# EAGLE board board (EAGLE 9.1.3)
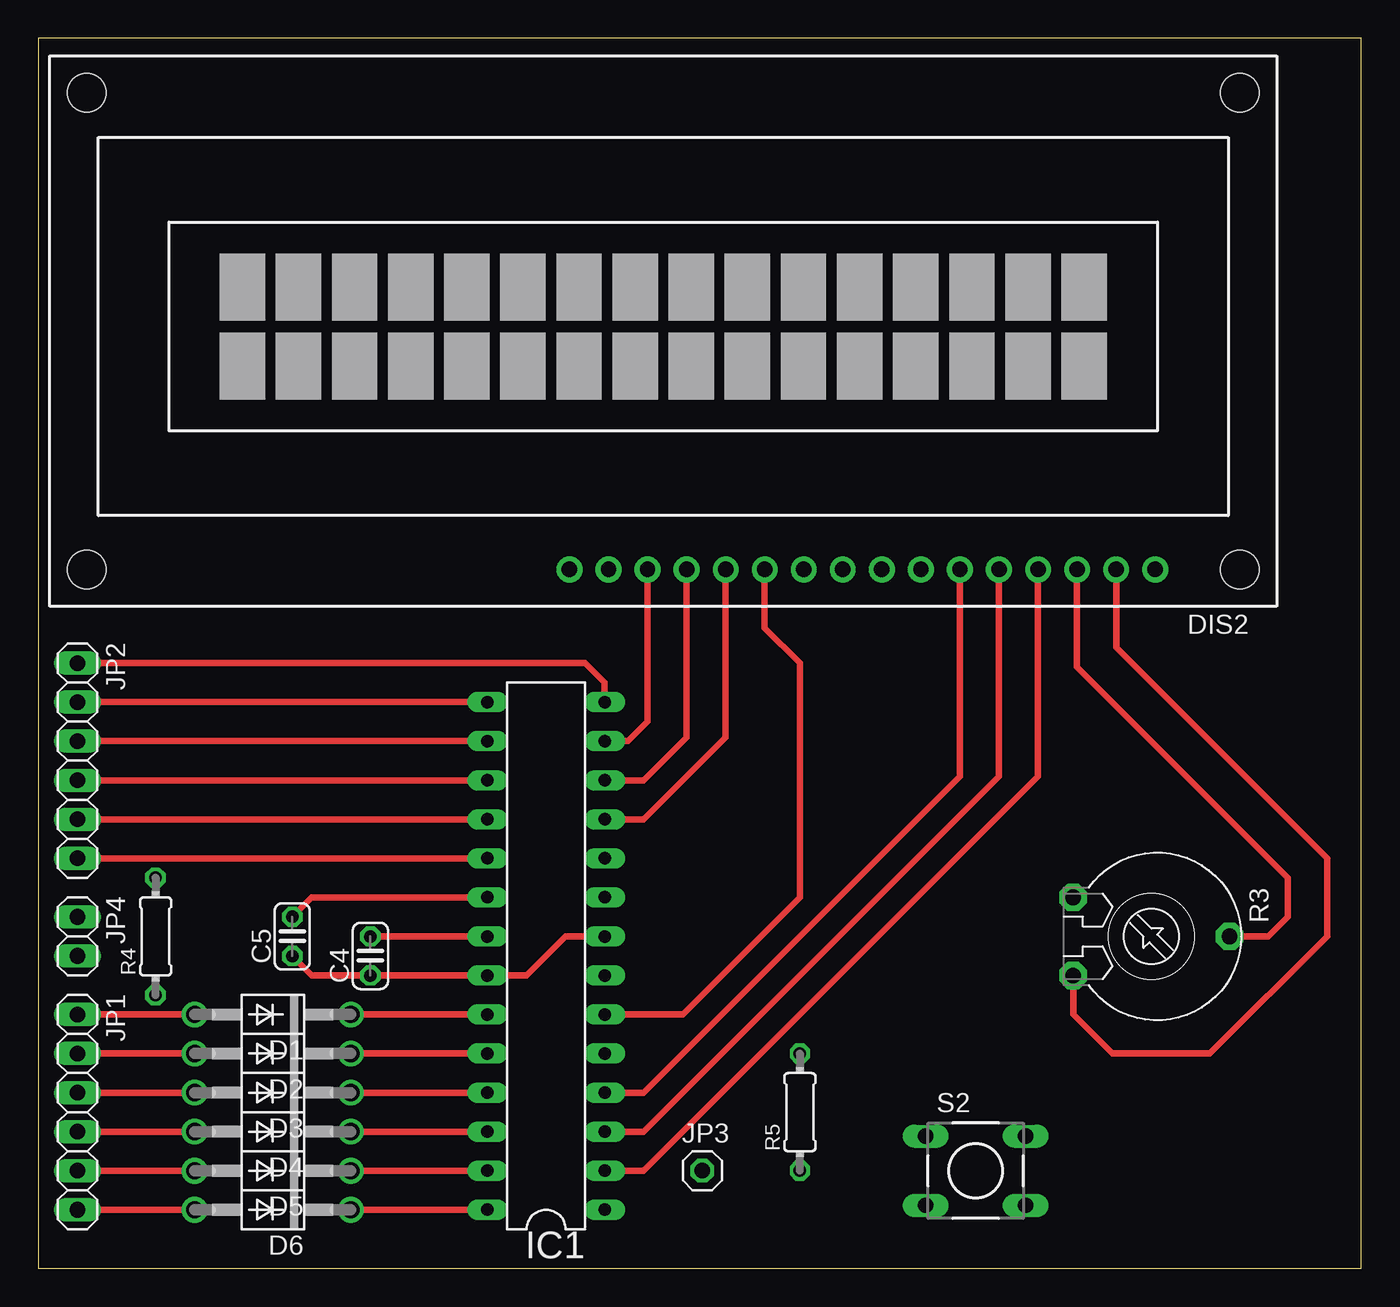
[diagram p0: board, top side]
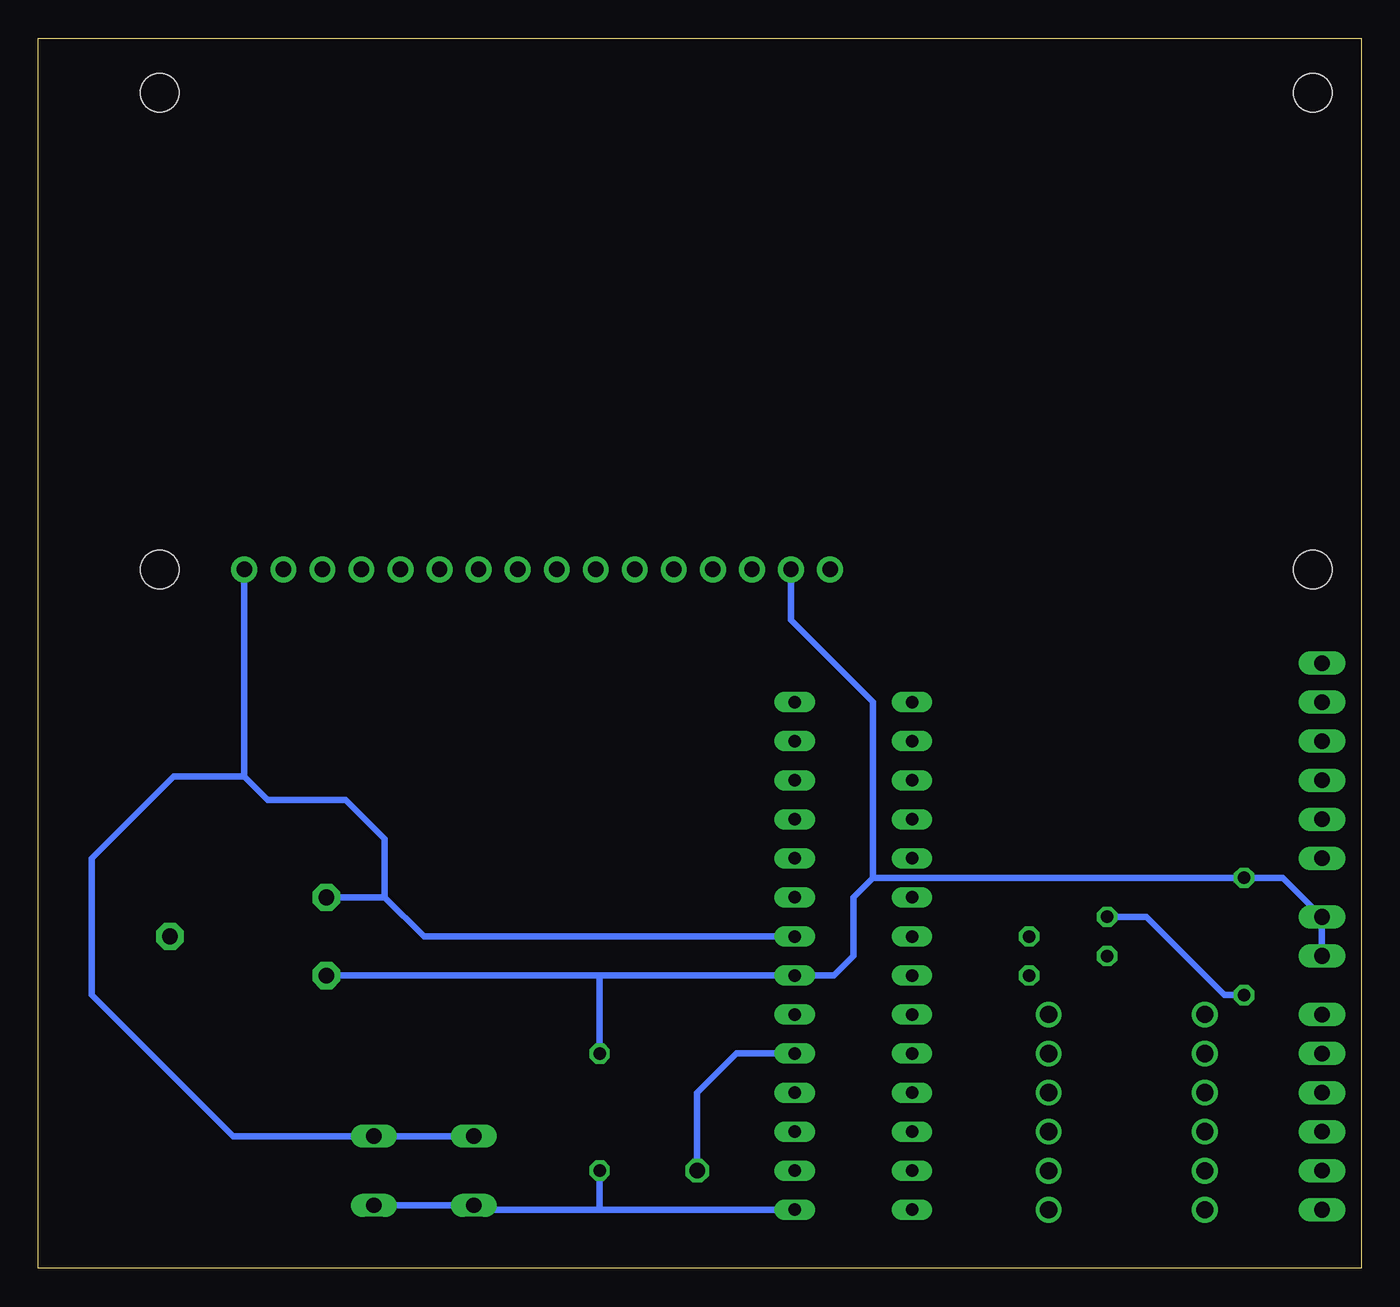
[diagram p1: board, bottom side, seen from below]

Size 86.03 x 80 mm. Coordinates in mm from the lower left corner, seen from the top.
Outline: 0,0 86.03,0 86.03,80 0,80 0,0
Copper layers (1*16): Top 0.035mm / dielectric 1.5mm / Bottom 0.035mm
Design rules "default": minimum track width 6mil, minimum drill 0.35mm, track to track 6mil, track to pad 6mil, pad to pad 6mil, via to via 6mil, smd to smd 6mil, copper to edge 40mil, drill to drill 6mil, minimum pad ring 10mil, minimum via ring 8mil, stop-mask expansion 4mil, vias tented up to drill 0mil, thermal gap 10mil
Net classes: 0 default: clearance 0.205 mm

## Footprints (pad centres in the part's own frame; a part is rotated, then mirrored left to right if it is on the bottom)
C025-024X044 = drill 0.813 octagon: 1 -1.27,0; 2 1.27,0
DO41-10 = drill 1.118: A 5.08,0; C -5.08,0
TUXGR_16X2_R2 = drill 1 pad 1.676: 1 -32,15.5; 2 -29.46,15.5; 3 -26.92,15.5; 4 -24.38,15.5; 5 -21.84,15.5; 6 -19.3,15.5; 7 -16.76,15.5; 8 -14.22,15.5; 9 -11.68,15.5; 10 -9.14,15.5; 11 -6.6,15.5; 12 -4.06,15.5; 13 -1.52,15.5; 14 1.02,15.5; 15 3.56,15.5; 16 6.1,15.5 | hole 2.5: -37.5,-15.5; 37.5,-15.5; -37.5,15.5; 37.5,15.5
DIL28-3 = drill 0.813 long: 1 -16.51,-3.81; 2 -13.97,-3.81; 3 -11.43,-3.81; 4 -8.89,-3.81; 5 -6.35,-3.81; 6 -3.81,-3.81; 7 -1.27,-3.81; 8 1.27,-3.81; 9 3.81,-3.81; 10 6.35,-3.81; 11 8.89,-3.81; 12 11.43,-3.81; 13 13.97,-3.81; 14 16.51,-3.81; 15 16.51,3.81; 16 13.97,3.81; 17 11.43,3.81; 18 8.89,3.81; 19 6.35,3.81; 20 3.81,3.81; 21 1.27,3.81; 22 -1.27,3.81; 23 -3.81,3.81; 24 -6.35,3.81; 25 -8.89,3.81; 26 -11.43,3.81; 27 -13.97,3.81; 28 -16.51,3.81
1X06 = drill 1.016 long: 1 -6.35,0; 2 -3.81,0; 3 -1.27,0; 4 1.27,0; 5 3.81,0; 6 6.35,0
1X01 = drill 1.016 octagon: 1 0,0
1X02 = drill 1.016 long: 1 -1.27,0; 2 1.27,0
PT-10 = drill 1.016 pad 1.778 octagon: 1 -2.54,-5.08; 2 2.54,-5.08; 3 0,5.08
0204/7 = drill 0.813 octagon: 1 -3.81,0; 2 3.81,0
DTS-6 = drill 1 long: 1 -3.25,2.25; 2 3.25,2.25; 3 -3.25,-2.25; 4 3.25,-2.25

## Placement (x,y rotation side)
C4  100nF  [C025-024X044]  21.59,20.32 90 top
C5  100nF  [C025-024X044]  16.51,21.59 90 top
D1  1N4004  [DO41-10]  15.24,16.51 180 top
D2  1N4004  [DO41-10]  15.24,13.97 180 top
D3  1N4004  [DO41-10]  15.24,11.43 180 top
D4  1N4004  [DO41-10]  15.24,8.89 180 top
D5  1N4004  [DO41-10]  15.24,6.35 180 top
D6  1N4004  [DO41-10]  15.24,3.81 180 top
DIS2  TUXGR_16X2_R2  [TUXGR_16X2_R2]  40.64,60.96 180 top
IC1  ATMEGA328-20P  [DIL28-3]  33.02,20.32 90 top
JP1  [1X06]  2.54,10.16 270 top
JP2  [1X06]  2.54,33.02 270 top
JP3  [1X01]  43.18,6.35 0 top
JP4  [1X02]  2.54,21.59 270 top
R3  10K  [PT-10]  72.39,21.59 270 top
R4  10K  [0204/7]  7.62,21.59 90 top
R5  10K  [0204/7]  49.53,10.16 90 top
S2  DTS-6  [DTS-6]  60.96,6.35 0 top

## Library data of the parts
C4 C5 = rcl; SPICEPREFIX: C
D1-D6 = diode
DIS2 = display-lcd; OC_FARNELL: unknown; OC_NEWARK: unknown
IC1 = atmega328
JP1-JP4 = pinhead
R3 = rcl; SPICEMODEL: POT; SPICEPREFIX: X
R4 R5 = eagle-ltspice; SPICEMODEL: NONE; SPICEPREFIX: R
S2 = switch-tact

## Nets
GND: C4.1 C5.1 DIS2.1 IC1.8 IC1.22 R3.1 S2.1 S2.2
N$1: D1.C IC1.23
N$2: D2.C IC1.24
N$3: DIS2.3 R3.3
N$4: DIS2.6 IC1.4
N$5: C5.2 IC1.20 R4.1
N$6: DIS2.5 IC1.3
N$7: IC1.5 JP3.1
N$8: DIS2.11 IC1.6
N$9: DIS2.12 IC1.11
N$10: DIS2.13 IC1.12
N$11: DIS2.14 IC1.13
N$12: IC1.1 R5.1 S2.3 S2.4
N$13: DIS2.4 IC1.2
N$14: C4.2 IC1.21
N$15: D3.C IC1.25
N$16: D4.C IC1.26
N$17: D5.C IC1.27
N$18: D6.C IC1.28
N$19: IC1.14 JP2.1
N$20: IC1.15 JP2.2
N$21: IC1.16 JP2.3
N$22: IC1.17 JP2.4
N$23: IC1.18 JP2.5
N$24: IC1.19 JP2.6
N$25: DIS2.16
N$26: D1.A JP1.1
N$27: D2.A JP1.2
N$28: D3.A JP1.3
N$29: D4.A JP1.4
N$30: D5.A JP1.5
N$31: D6.A JP1.6
N$33: DIS2.2 DIS2.15 IC1.7 JP4.1 JP4.2 R3.2 R4.2 R5.2

## Tracks (layer width: path | path; a pad name or v marks a point on that pad's centre or on a via)
GND
  Top 0.406: IC1.8 34.29,21.59 31.75,19.05 IC1.22 C4.1 17.78,19.05 C5.1
  Bottom 0.152: IC1.8 41.91,21.59 | 41.91,21.59 60.96,21.59 63.5,24.13 | DIS2.1 72.64,32 71.12,30.48 | 41.91,21.59
  Bottom 0.406: IC1.8 60.96,21.59 63.5,24.13 | 63.5,24.13 R3.1 | S2.1 S2.2 73.37,8.6 82.55,17.78 82.55,26.67 77.22,32 72.64,32 | 63.5,24.13 63.5,27.94 66.04,30.48 71.12,30.48 72.64,32 | 72.64,32 DIS2.1
N$1
  Top 0.406: IC1.23 D1.C
N$2
  Top 0.406: D2.C IC1.24
N$3
  Top 0.406: DIS2.3 67.56,39.12 81.28,25.4 81.28,22.86 80.01,21.59 R3.3
N$4
  Top 0.406: IC1.4 39.37,11.43 59.94,32 DIS2.6
N$5
  Top 0.406: C5.2 17.78,24.13 IC1.20
  Bottom 0.406: R4.1 8.89,17.78 13.97,22.86 C5.2
N$6
  Top 0.406: IC1.3 39.37,8.89 62.48,32 DIS2.5
N$7
  Bottom 0.406: IC1.5 40.64,13.97 43.18,11.43 JP3.1
N$8
  Top 0.406: DIS2.11 47.24,41.65 49.52,39.37 49.52,24.12 41.91,16.51 IC1.6
N$9
  Top 0.406: DIS2.12 44.7,34.54 39.37,29.21 IC1.11
N$10
  Top 0.406: DIS2.13 42.16,34.54 39.37,31.75 IC1.12
N$11
  Top 0.406: IC1.13 38.35,34.29 39.62,35.56 DIS2.14
N$12
  Bottom 0.152: IC1.1 49.53,3.81 57.42,3.81 S2.3 58.42,4.1 60.96,4.1 63.5,4.1 S2.4
  Bottom 0.406: IC1.1 49.53,3.81 | 49.53,3.81 58.13,3.81 58.42,4.1 | R5.1 49.53,3.81 | 60.96,4.1 S2.3 60.96,4.1 | 60.96,4.1 63.5,4.1 S2.4 60.96,4.1
N$13
  Top 0.406: IC1.2 39.37,6.35 65.02,32 DIS2.4
N$14
  Top 0.406: C4.2 IC1.21
N$15
  Top 0.406: IC1.25 D3.C
N$16
  Top 0.406: D4.C IC1.26
N$17
  Top 0.406: IC1.27 D5.C
N$18
  Top 0.406: D6.C IC1.28
N$19
  Top 0.406: JP2.1 35.56,39.37 36.83,38.1 IC1.14
N$20
  Top 0.406: JP2.2 IC1.15
N$21
  Top 0.406: JP2.3 IC1.16
N$22
  Top 0.406: JP2.4 IC1.17
N$23
  Top 0.406: JP2.5 IC1.18
N$24
  Top 0.406: JP2.6 IC1.19
N$26
  Top 0.406: D1.A JP1.1
N$27
  Top 0.406: JP1.2 D2.A
N$28
  Top 0.406: D3.A JP1.3
N$29
  Top 0.406: JP1.4 D4.A
N$30
  Top 0.406: D5.A JP1.5
N$31
  Top 0.406: JP1.6 D6.A
N$33
  Top 0.406: R3.2 67.31,16.51 69.85,13.97 76.2,13.97 83.82,21.59 83.82,26.67 70.1,40.39 DIS2.2
  Bottom 0.152: IC1.7 49.53,19.05 R3.2
  Bottom 0.406: JP4.2 JP4.1 5.08,25.4 R4.2 31.75,25.4 | 31.75,25.4 33.02,24.13 33.02,20.32 34.29,19.05 IC1.7 49.53,19.05 | DIS2.15 37.08,42.16 31.75,36.83 31.75,25.4 | 49.53,19.05 R3.2 | 49.53,19.05 R5.2